# EAGLE board IOB-generic_array (EAGLE 7.7.0)
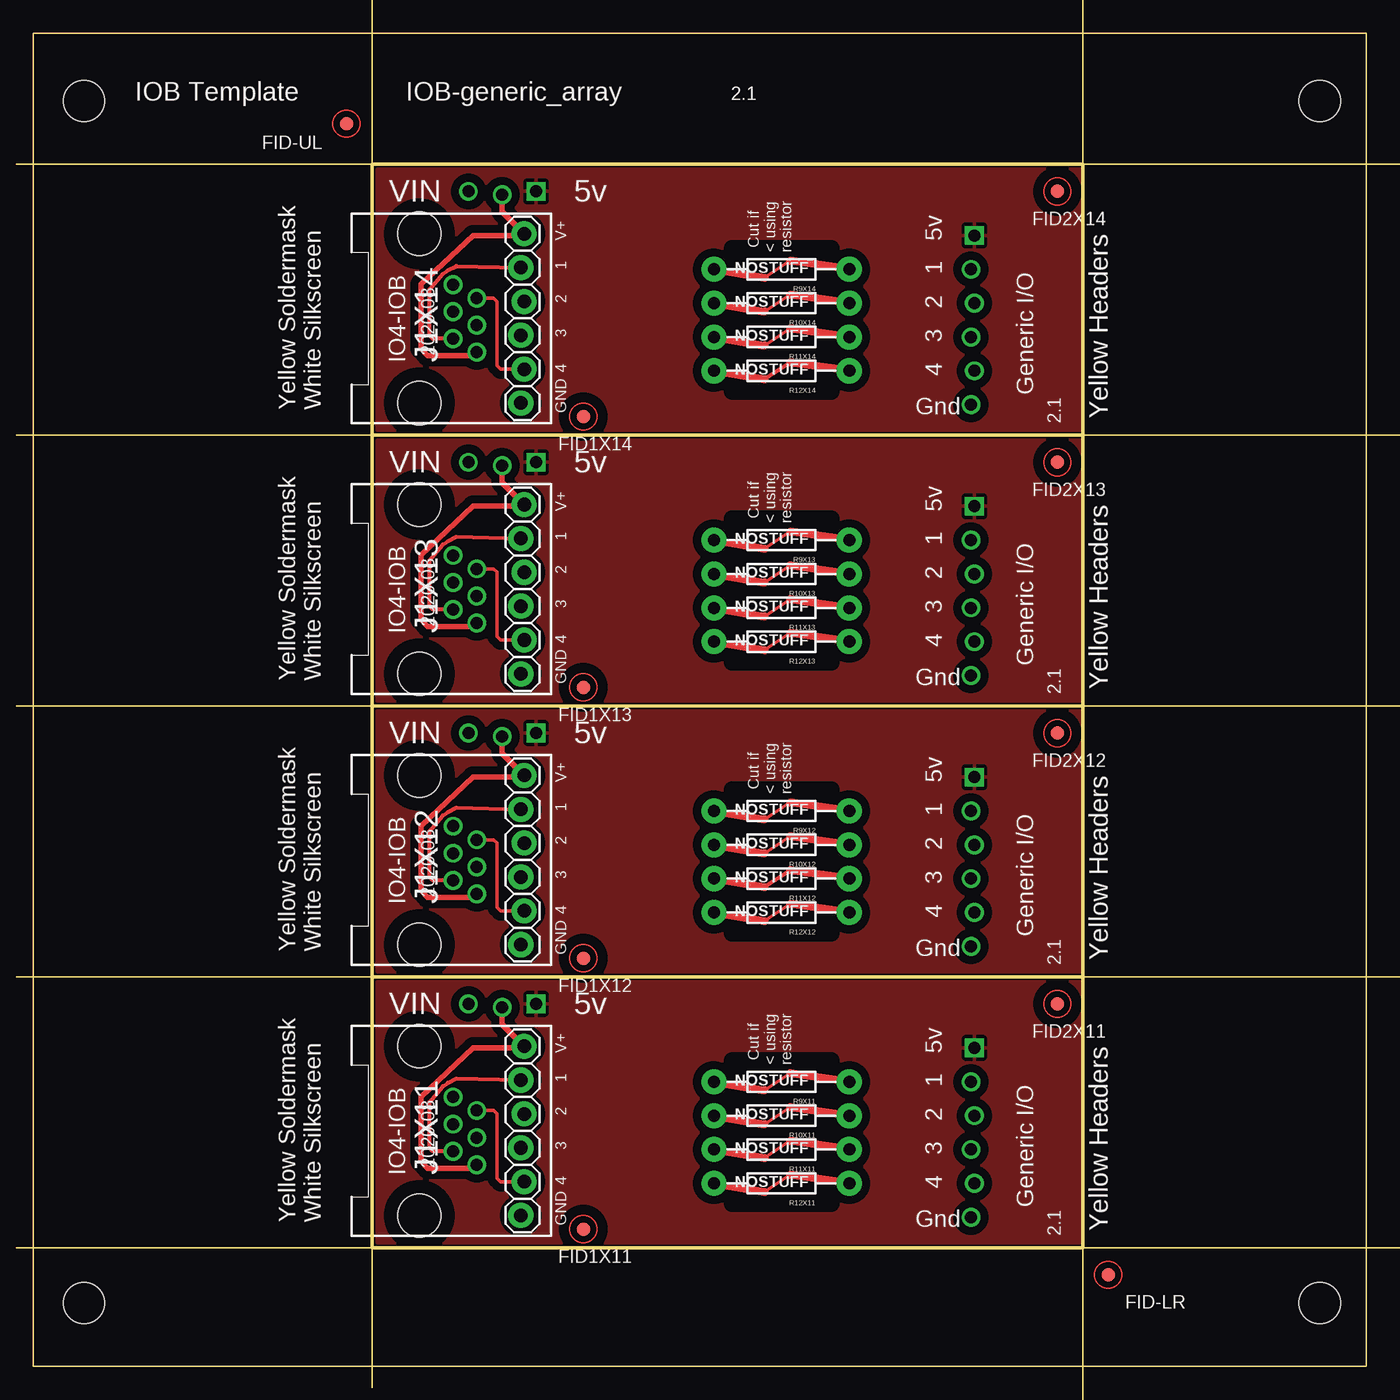
[diagram p0: board, top side]
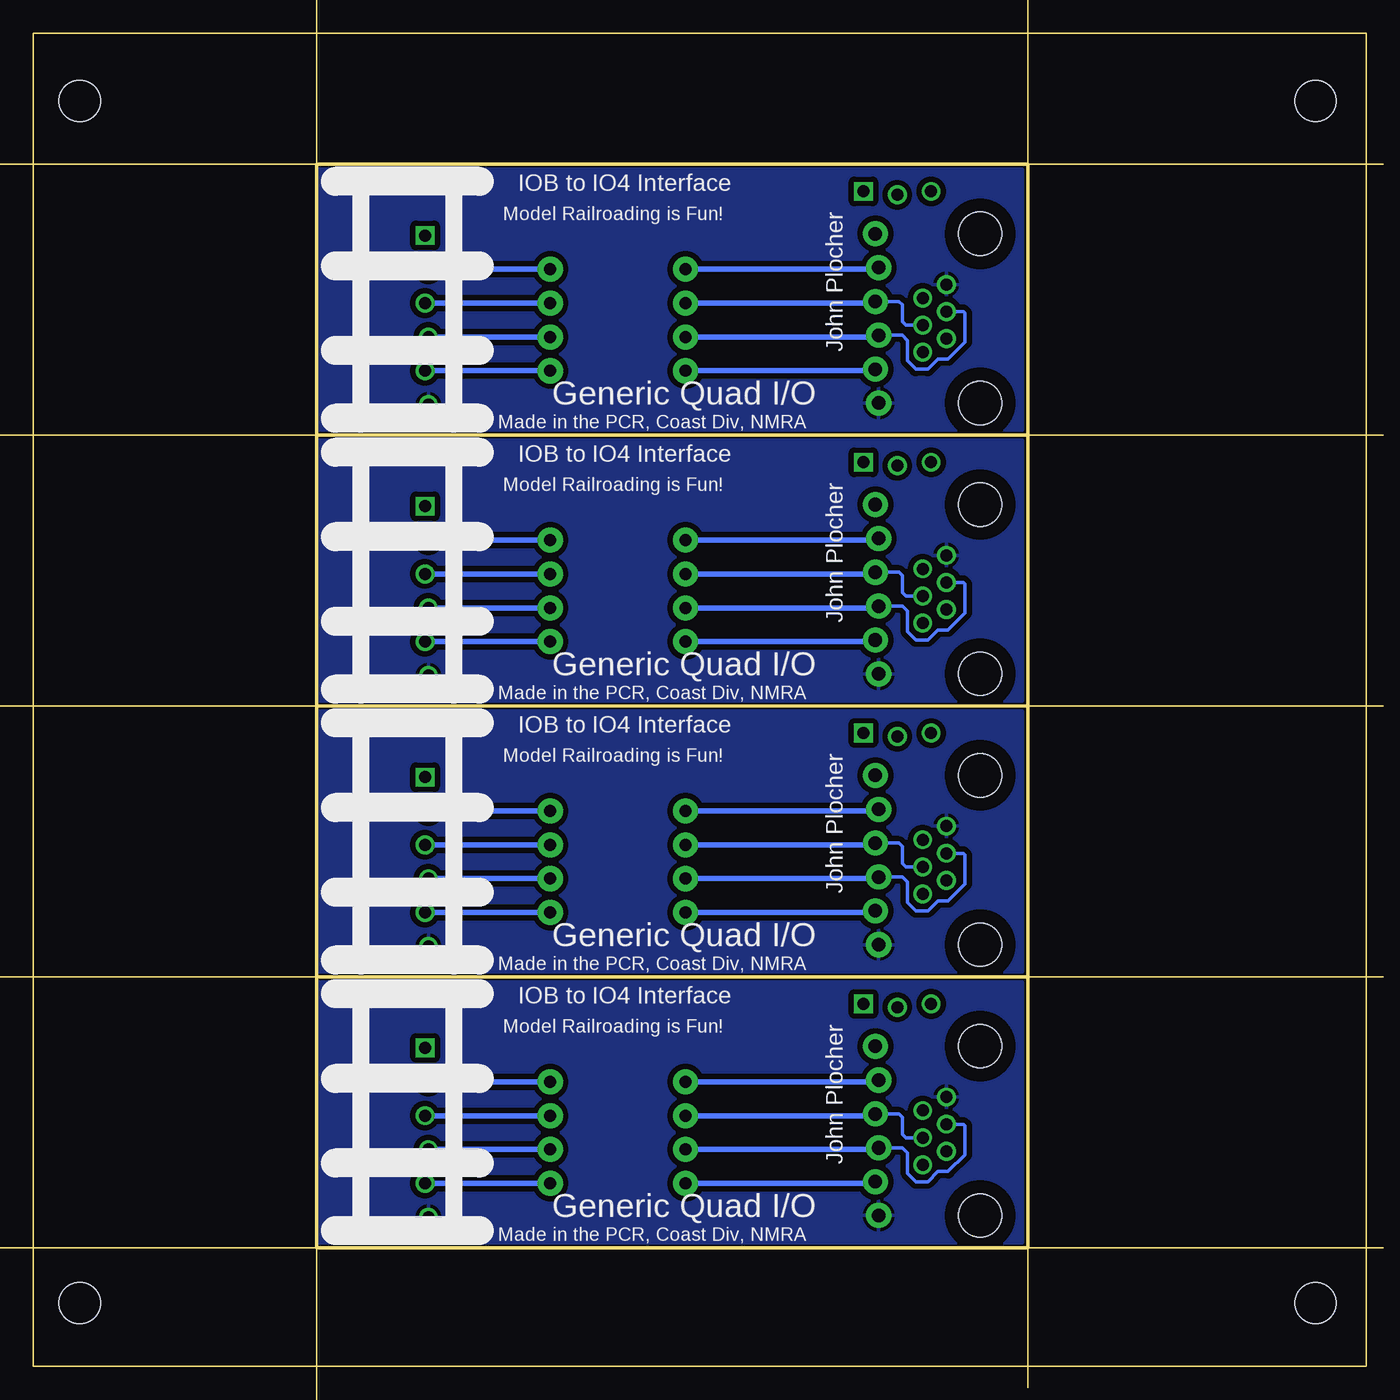
[diagram p1: board, bottom side, seen from below]

Size 100 x 100 mm. Coordinates in mm from the lower left corner, seen from the top.
Copper layers (1*16): Top 0.035mm / dielectric 1.5mm / Bottom 0.035mm
Design rules "default": minimum track width 10mil, minimum drill 0.6mm, track to track 8mil, track to pad 8mil, pad to pad 8mil, via to via 8mil, smd to smd 8mil, copper to edge 40mil, drill to drill 8mil, minimum pad ring 10mil, minimum via ring 8mil, stop-mask expansion 4mil, vias tented up to drill 0mil, thermal gap 10mil
tRestrict: area 52.4,12.2 to 59.9,22.9; area 52.4,32.5 to 59.9,43.3; area 52.4,52.8 to 59.9,63.6; area 52.4,73.1 to 59.9,83.9
Milling: 19 lines

## Footprints (pad centres in the part's own frame; a part is rotated, then mirrored left to right if it is on the bottom)
FIDUCIAL_1MM = smd 1 x 1: 1 0,0
IO4-IOB = drill 0.9: G@3 44.958,2.286; P1 44.958,12.446; P2 45.212,9.906; P3 44.958,7.366; P4 45.212,4.826; V+ 7.239,18.288; VOUT 9.779,18.034 | drill 0.9 square: V5 12.319,18.288; V5@1 45.212,14.986
RJ24-INVERTED-PINS = drill 1.016 pad 1.88: 1 6.35,-4.064; 2 3.81,-3.81; 3 1.27,-4.064; 4 -1.27,-3.81; 5 -3.81,-4.064; 6 -6.35,-3.81 | drill 0.9 pad 1.4: 1@1 -2.54,-0.508; 2@1 -1.524,1.27; 3@1 -0.508,-0.508; 4@1 0.508,1.27; 5@1 1.524,-0.508; 6@1 2.54,1.27 | hole 3.251: 6.35,3.81; -6.35,3.81
AXIAL-0.4-RES = drill 0.9 pad 1.88: P$1 -5.08,0; P$2 5.08,0
BOARD-DINRAIL-3.17IN-H4X-IOB = hole 3.1: 96.52,94.92; 96.52,4.75; 3.81,94.92; 3.81,4.75

## Placement (x,y rotation side)
FID1X11  FIDUCIAL  [FIDUCIAL_1MM]  41.27,10.29 0 top
FID1X12  FIDUCIAL  [FIDUCIAL_1MM]  41.27,30.61 0 top
FID1X13  FIDUCIAL  [FIDUCIAL_1MM]  41.27,50.93 0 top
FID1X14  FIDUCIAL  [FIDUCIAL_1MM]  41.27,71.25 0 top
FID2X11  FIDUCIAL  [FIDUCIAL_1MM]  76.83,27.18 0 top
FID2X12  FIDUCIAL  [FIDUCIAL_1MM]  76.83,47.5 0 top
FID2X13  FIDUCIAL  [FIDUCIAL_1MM]  76.83,67.82 0 top
FID2X14  FIDUCIAL  [FIDUCIAL_1MM]  76.83,88.14 0 top
FID-LR  FIDUCIAL  [FIDUCIAL_1MM]  80.64,6.86 0 top
FID-UL  FIDUCIAL  [FIDUCIAL_1MM]  23.5,93.22 0 top
IOBX11  CONNECTOR-IO4-IOBFULL  [IO4-IOB]  25.4,8.89 0 top
IOBX12  CONNECTOR-IO4-IOBFULL  [IO4-IOB]  25.4,29.21 0 top
IOBX13  CONNECTOR-IO4-IOBFULL  [IO4-IOB]  25.4,49.53 0 top
IOBX14  CONNECTOR-IO4-IOBFULL  [IO4-IOB]  25.4,69.85 0 top
J1X11  RJ12/6  [RJ24-INVERTED-PINS]  32.77,17.65 90 top
J1X12  RJ12/6  [RJ24-INVERTED-PINS]  32.77,37.97 90 top
J1X13  RJ12/6  [RJ24-INVERTED-PINS]  32.77,58.29 90 top
J1X14  RJ12/6  [RJ24-INVERTED-PINS]  32.77,78.61 90 top
R9X11  NOSTUFF  [AXIAL-0.4-RES]  56.13,21.34 180 top
R9X12  NOSTUFF  [AXIAL-0.4-RES]  56.13,41.66 180 top
R9X13  NOSTUFF  [AXIAL-0.4-RES]  56.13,61.98 180 top
R9X14  NOSTUFF  [AXIAL-0.4-RES]  56.13,82.3 180 top
R10X11  NOSTUFF  [AXIAL-0.4-RES]  56.13,18.8 180 top
R10X12  NOSTUFF  [AXIAL-0.4-RES]  56.13,39.12 180 top
R10X13  NOSTUFF  [AXIAL-0.4-RES]  56.13,59.44 180 top
R10X14  NOSTUFF  [AXIAL-0.4-RES]  56.13,79.76 180 top
R11X11  NOSTUFF  [AXIAL-0.4-RES]  56.13,16.26 180 top
R11X12  NOSTUFF  [AXIAL-0.4-RES]  56.13,36.58 180 top
R11X13  NOSTUFF  [AXIAL-0.4-RES]  56.13,56.9 180 top
R11X14  NOSTUFF  [AXIAL-0.4-RES]  56.13,77.22 180 top
R12X1  [BOARD-DINRAIL-3.17IN-H4X-IOB]  0,0 0 top
R12X11  NOSTUFF  [AXIAL-0.4-RES]  56.13,13.72 180 top
R12X12  NOSTUFF  [AXIAL-0.4-RES]  56.13,34.04 180 top
R12X13  NOSTUFF  [AXIAL-0.4-RES]  56.13,54.36 180 top
R12X14  NOSTUFF  [AXIAL-0.4-RES]  56.13,74.68 180 top

## Library data of the parts
FID1X11-FID1X14 FID2X11-FID2X14 FID-LR FID-UL IOBX11-IOBX14 J1X11-J1X14 R9X11-R9X14 R10X11-R10X14 R11X11-R11X14 R12X1 R12X11-R12X14 = SPCoast

## Nets
!IO1X11: J1X11.2 J1X11.2@1 R9X11.P$2
!IO1X12: J1X12.2 J1X12.2@1 R9X12.P$2
!IO1X13: J1X13.2 J1X13.2@1 R9X13.P$2
!IO1X14: J1X14.2 J1X14.2@1 R9X14.P$2
!IO2X11: J1X11.3 J1X11.3@1 R10X11.P$2
!IO2X12: J1X12.3 J1X12.3@1 R10X12.P$2
!IO2X13: J1X13.3 J1X13.3@1 R10X13.P$2
!IO2X14: J1X14.3 J1X14.3@1 R10X14.P$2
!IO3X11: J1X11.4 J1X11.4@1 R11X11.P$2
!IO3X12: J1X12.4 J1X12.4@1 R11X12.P$2
!IO3X13: J1X13.4 J1X13.4@1 R11X13.P$2
!IO3X14: J1X14.4 J1X14.4@1 R11X14.P$2
!IO4X11: J1X11.5 J1X11.5@1 R12X11.P$2
!IO4X12: J1X12.5 J1X12.5@1 R12X12.P$2
!IO4X13: J1X13.5 J1X13.5@1 R12X13.P$2
!IO4X14: J1X14.5 J1X14.5@1 R12X14.P$2
GNDX11: IOBX11.G@3 J1X11.6 J1X11.6@1
GNDX12: IOBX12.G@3 J1X12.6 J1X12.6@1
GNDX13: IOBX13.G@3 J1X13.6 J1X13.6@1
GNDX14: IOBX14.G@3 J1X14.6 J1X14.6@1
P1X11: IOBX11.P1 R9X11.P$1
P1X12: IOBX12.P1 R9X12.P$1
P1X13: IOBX13.P1 R9X13.P$1
P1X14: IOBX14.P1 R9X14.P$1
P2X11: IOBX11.P2 R10X11.P$1
P2X12: IOBX12.P2 R10X12.P$1
P2X13: IOBX13.P2 R10X13.P$1
P2X14: IOBX14.P2 R10X14.P$1
P3X11: IOBX11.P3 R11X11.P$1
P3X12: IOBX12.P3 R11X12.P$1
P3X13: IOBX13.P3 R11X13.P$1
P3X14: IOBX14.P3 R11X14.P$1
P4X11: IOBX11.P4 R12X11.P$1
P4X12: IOBX12.P4 R12X12.P$1
P4X13: IOBX13.P4 R12X13.P$1
P4X14: IOBX14.P4 R12X14.P$1
VCCIOX11: IOBX11.V5 IOBX11.V5@1
VCCIOX12: IOBX12.V5 IOBX12.V5@1
VCCIOX13: IOBX13.V5 IOBX13.V5@1
VCCIOX14: IOBX14.V5 IOBX14.V5@1
VINX11: IOBX11.V+
VINX12: IOBX12.V+
VINX13: IOBX13.V+
VINX14: IOBX14.V+
VOUTX11: IOBX11.VOUT J1X11.1 J1X11.1@1
VOUTX12: IOBX12.VOUT J1X12.1 J1X12.1@1
VOUTX13: IOBX13.VOUT J1X13.1 J1X13.1@1
VOUTX14: IOBX14.VOUT J1X14.1 J1X14.1@1

## Tracks (layer width: path | path; a pad name or v marks a point on that pad's centre or on a via)
!IO1X11
  Top 0.254: 54.86,20.7 56.77,21.97
  Top 0.305: J1X11.2@1 29.97,16.13 29.72,16.38 29.72,19.81 30.73,21.01 31.11,21.26 31.75,21.59 J1X11.2
  Top 0.61: R9X11.P$2 54.86,20.7
  Bottom 0.406: R9X11.P$2 36.7,21.34 J1X11.2
!IO1X12
  Top 0.254: 54.86,41.02 56.77,42.29
  Top 0.305: J1X12.2@1 29.97,36.45 29.72,36.7 29.72,40.13 30.73,41.33 31.11,41.58 31.75,41.91 J1X12.2
  Top 0.61: R9X12.P$2 54.86,41.02
  Bottom 0.406: R9X12.P$2 36.7,41.66 J1X12.2
!IO1X13
  Top 0.254: 54.86,61.34 56.77,62.61
  Top 0.305: J1X13.2@1 29.97,56.77 29.72,57.02 29.72,60.45 30.73,61.65 31.11,61.9 31.75,62.23 J1X13.2
  Top 0.61: R9X13.P$2 54.86,61.34
  Bottom 0.406: R9X13.P$2 36.7,61.98 J1X13.2
!IO1X14
  Top 0.254: 54.86,81.66 56.77,82.93
  Top 0.305: J1X14.2@1 29.97,77.09 29.72,77.34 29.72,80.77 30.73,81.97 31.11,82.22 31.75,82.55 J1X14.2
  Top 0.61: R9X14.P$2 54.86,81.66
  Bottom 0.406: R9X14.P$2 36.7,82.3 J1X14.2
!IO2X11
  Top 0.254: 54.86,18.16 56.77,19.43
  Top 0.61: R10X11.P$2 54.86,18.16
  Bottom 0.254: J1X11.3@1 34.54,17.14 34.8,17.4 34.8,18.67 35.05,18.92 J1X11.3
  Bottom 0.406: R10X11.P$2 36.96,18.8 J1X11.3
!IO2X12
  Top 0.254: 54.86,38.48 56.77,39.75
  Top 0.61: R10X12.P$2 54.86,38.48
  Bottom 0.254: J1X12.3@1 34.54,37.47 34.8,37.72 34.8,38.99 35.05,39.24 J1X12.3
  Bottom 0.406: R10X12.P$2 36.96,39.12 J1X12.3
!IO2X13
  Top 0.254: 54.86,58.8 56.77,60.07
  Top 0.61: R10X13.P$2 54.86,58.8
  Bottom 0.254: J1X13.3@1 34.54,57.78 34.8,58.04 34.8,59.31 35.05,59.56 J1X13.3
  Bottom 0.406: R10X13.P$2 36.96,59.44 J1X13.3
!IO2X14
  Top 0.254: 54.86,79.12 56.77,80.39
  Top 0.61: R10X14.P$2 54.86,79.12
  Bottom 0.254: J1X14.3@1 34.54,78.11 34.8,78.36 34.8,79.63 35.05,79.88 J1X14.3
  Bottom 0.406: R10X14.P$2 36.96,79.76 J1X14.3
!IO3X11
  Top 0.254: 54.86,15.62 56.77,16.89
  Top 0.61: R11X11.P$2 54.86,15.62
  Bottom 0.254: J1X11.4@1 30.23,18.16 30.1,18.03 30.1,15.88 31.37,14.61 32.13,14.61 32.89,13.84 33.78,13.84 34.42,14.48 34.42,16 34.8,16.38 J1X11.4
  Bottom 0.406: R11X11.P$2 36.7,16.26 J1X11.4
!IO3X12
  Top 0.254: 54.86,35.94 56.77,37.21
  Top 0.61: R11X12.P$2 54.86,35.94
  Bottom 0.254: J1X12.4@1 30.23,38.48 30.1,38.35 30.1,36.2 31.37,34.92 32.13,34.92 32.89,34.16 33.78,34.16 34.42,34.8 34.42,36.32 34.8,36.7 J1X12.4
  Bottom 0.406: R11X12.P$2 36.7,36.58 J1X12.4
!IO3X13
  Top 0.254: 54.86,56.26 56.77,57.53
  Top 0.61: R11X13.P$2 54.86,56.26
  Bottom 0.254: J1X13.4@1 30.23,58.8 30.1,58.67 30.1,56.52 31.37,55.24 32.13,55.24 32.89,54.48 33.78,54.48 34.42,55.12 34.42,56.64 34.8,57.02 J1X13.4
  Bottom 0.406: R11X13.P$2 36.7,56.9 J1X13.4
!IO3X14
  Top 0.254: 54.86,76.58 56.77,77.85
  Top 0.61: R11X14.P$2 54.86,76.58
  Bottom 0.254: J1X14.4@1 30.23,79.12 30.1,78.99 30.1,76.83 31.37,75.56 32.13,75.56 32.89,74.8 33.78,74.8 34.42,75.44 34.42,76.96 34.8,77.34 J1X14.4
  Bottom 0.406: R11X14.P$2 36.7,77.22 J1X14.4
!IO4X11
  Top 0.254: 54.86,13.08 56.77,14.35 | J1X11.5@1 34.54,19.18 34.8,18.92 34.8,14.1 35.05,13.84 J1X11.5
  Top 0.61: R12X11.P$2 54.86,13.08
  Bottom 0.406: R12X11.P$2 36.96,13.72 J1X11.5
!IO4X12
  Top 0.254: 54.86,33.4 56.77,34.67 | J1X12.5@1 34.54,39.5 34.8,39.24 34.8,34.42 35.05,34.16 J1X12.5
  Top 0.61: R12X12.P$2 54.86,33.4
  Bottom 0.406: R12X12.P$2 36.96,34.04 J1X12.5
!IO4X13
  Top 0.254: 54.86,53.72 56.77,54.99 | J1X13.5@1 34.54,59.82 34.8,59.56 34.8,54.74 35.05,54.48 J1X13.5
  Top 0.61: R12X13.P$2 54.86,53.72
  Bottom 0.406: R12X13.P$2 36.96,54.36 J1X13.5
!IO4X14
  Top 0.254: 54.86,74.04 56.77,75.31 | J1X14.5@1 34.54,80.14 34.8,79.88 34.8,75.06 35.05,74.8 J1X14.5
  Top 0.61: R12X14.P$2 54.86,74.04
  Bottom 0.406: R12X14.P$2 36.96,74.68 J1X14.5
GNDX11
  pour Bottom (isolate 0.406): 25.78,9.27 25.78,28.83 78.74,28.83 78.74,9.27
GNDX12
  pour Bottom (isolate 0.406): 25.78,29.59 25.78,49.15 78.74,49.15 78.74,29.59
GNDX13
  pour Bottom (isolate 0.406): 25.78,49.91 25.78,69.47 78.74,69.47 78.74,49.91
GNDX14
  pour Bottom (isolate 0.406): 25.78,70.23 25.78,89.79 78.74,89.79 78.74,70.23
P1X11
  Top 0.61: R9X11.P$1 56.77,21.97
  Bottom 0.406: IOBX11.P1 R9X11.P$1
P1X12
  Top 0.61: R9X12.P$1 56.77,42.29
  Bottom 0.406: IOBX12.P1 R9X12.P$1
P1X13
  Top 0.61: R9X13.P$1 56.77,62.61
  Bottom 0.406: IOBX13.P1 R9X13.P$1
P1X14
  Top 0.61: R9X14.P$1 56.77,82.93
  Bottom 0.406: IOBX14.P1 R9X14.P$1
P2X11
  Top 0.61: R10X11.P$1 56.77,19.43
  Bottom 0.406: IOBX11.P2 R10X11.P$1
P2X12
  Top 0.61: R10X12.P$1 56.77,39.75
  Bottom 0.406: IOBX12.P2 R10X12.P$1
P2X13
  Top 0.61: R10X13.P$1 56.77,60.07
  Bottom 0.406: IOBX13.P2 R10X13.P$1
P2X14
  Top 0.61: R10X14.P$1 56.77,80.39
  Bottom 0.406: IOBX14.P2 R10X14.P$1
P3X11
  Top 0.61: R11X11.P$1 56.77,16.89
  Bottom 0.406: IOBX11.P3 R11X11.P$1
P3X12
  Top 0.61: R11X12.P$1 56.77,37.21
  Bottom 0.406: IOBX12.P3 R11X12.P$1
P3X13
  Top 0.61: R11X13.P$1 56.77,57.53
  Bottom 0.406: IOBX13.P3 R11X13.P$1
P3X14
  Top 0.61: R11X14.P$1 56.77,77.85
  Bottom 0.406: IOBX14.P3 R11X14.P$1
P4X11
  Top 0.61: R12X11.P$1 56.77,14.35
  Bottom 0.406: IOBX11.P4 R12X11.P$1
P4X12
  Top 0.61: R12X12.P$1 56.77,34.67
  Bottom 0.406: IOBX12.P4 R12X12.P$1
P4X13
  Top 0.61: R12X13.P$1 56.77,54.99
  Bottom 0.406: IOBX13.P4 R12X13.P$1
P4X14
  Top 0.61: R12X14.P$1 56.77,75.31
  Bottom 0.406: IOBX14.P4 R12X14.P$1
VCCIOX11
  pour Top (isolate 0.61): 25.78,9.27 25.78,28.83 78.74,28.83 78.74,9.27
VCCIOX12
  pour Top (isolate 0.61): 25.78,29.59 25.78,49.15 78.74,49.15 78.74,29.59
VCCIOX13
  pour Top (isolate 0.61): 25.78,49.91 25.78,69.47 78.74,69.47 78.74,49.91
VCCIOX14
  pour Top (isolate 0.61): 25.78,70.23 25.78,89.79 78.74,89.79 78.74,70.23
VOUTX11
  Top 0.305: 36.7,23.88 J1X11.1
  Top 0.406: J1X11.1@1 32.89,15.11 32.64,14.86 29.59,14.86 29.08,15.37 29.08,20.22 32.99,23.88 36.7,23.88 | IOBX11.VOUT 35.18,25.65 J1X11.1
VOUTX12
  Top 0.305: 36.7,44.2 J1X12.1
  Top 0.406: J1X12.1@1 32.89,35.43 32.64,35.18 29.59,35.18 29.08,35.69 29.08,40.54 32.99,44.2 36.7,44.2 | IOBX12.VOUT 35.18,45.97 J1X12.1
VOUTX13
  Top 0.305: 36.7,64.52 J1X13.1
  Top 0.406: J1X13.1@1 32.89,55.75 32.64,55.5 29.59,55.5 29.08,56.01 29.08,60.86 32.99,64.52 36.7,64.52 | IOBX13.VOUT 35.18,66.29 J1X13.1
VOUTX14
  Top 0.305: 36.7,84.84 J1X14.1
  Top 0.406: J1X14.1@1 32.89,76.07 32.64,75.82 29.59,75.82 29.08,76.33 29.08,81.18 32.99,84.84 36.7,84.84 | IOBX14.VOUT 35.18,86.61 J1X14.1

## Text on the board
tPlace: 2.1 | Cut if / < using / resistor | 2020.08 | IO4-IOB | Generic I/O | Yellow Soldermask / White Silkscreen | 2.1 | Yellow Headers | Cut if / < using / resistor | IO4-IOB | 2020.08 | Generic I/O | Yellow Soldermask / White Silkscreen | Yellow Headers | 2.1 | Cut if / < using / resistor | IO4-IOB | 2020.08 | Generic I/O | Yellow Soldermask / White Silkscreen | 2.1 | Yellow Headers | Cut if / < using / resistor | 2020.08 | IO4-IOB | Generic I/O | Yellow Soldermask / White Silkscreen | 2.1 | Yellow Headers
bPlace: John Plocher | Generic Quad I/O | John Plocher | Generic Quad I/O | John Plocher | Generic Quad I/O | John Plocher | Generic Quad I/O
_tNames: FID2 | R9 | R10 | R11 | R12 | FID1 | FID2 | R9 | R10 | R11 | R12 | FID1 | FID2 | R9 | R10 | R11 | R12 | FID1 | FID2 | R9 | R10 | R11 | R12 | FID1